# Altium PCB ECE453.PcbDoc
Units mil, origin at the board's own origin, x right, y up, seen from the top; angles counter-clockwise.
Board outline 2347.18 x 3917.24 mil, 2 copper layers (Top Layer, Bottom Layer); 28 components, 18 nets, 75 pads, 25 vias.
Unrouted connection lines stored in the file: 16.
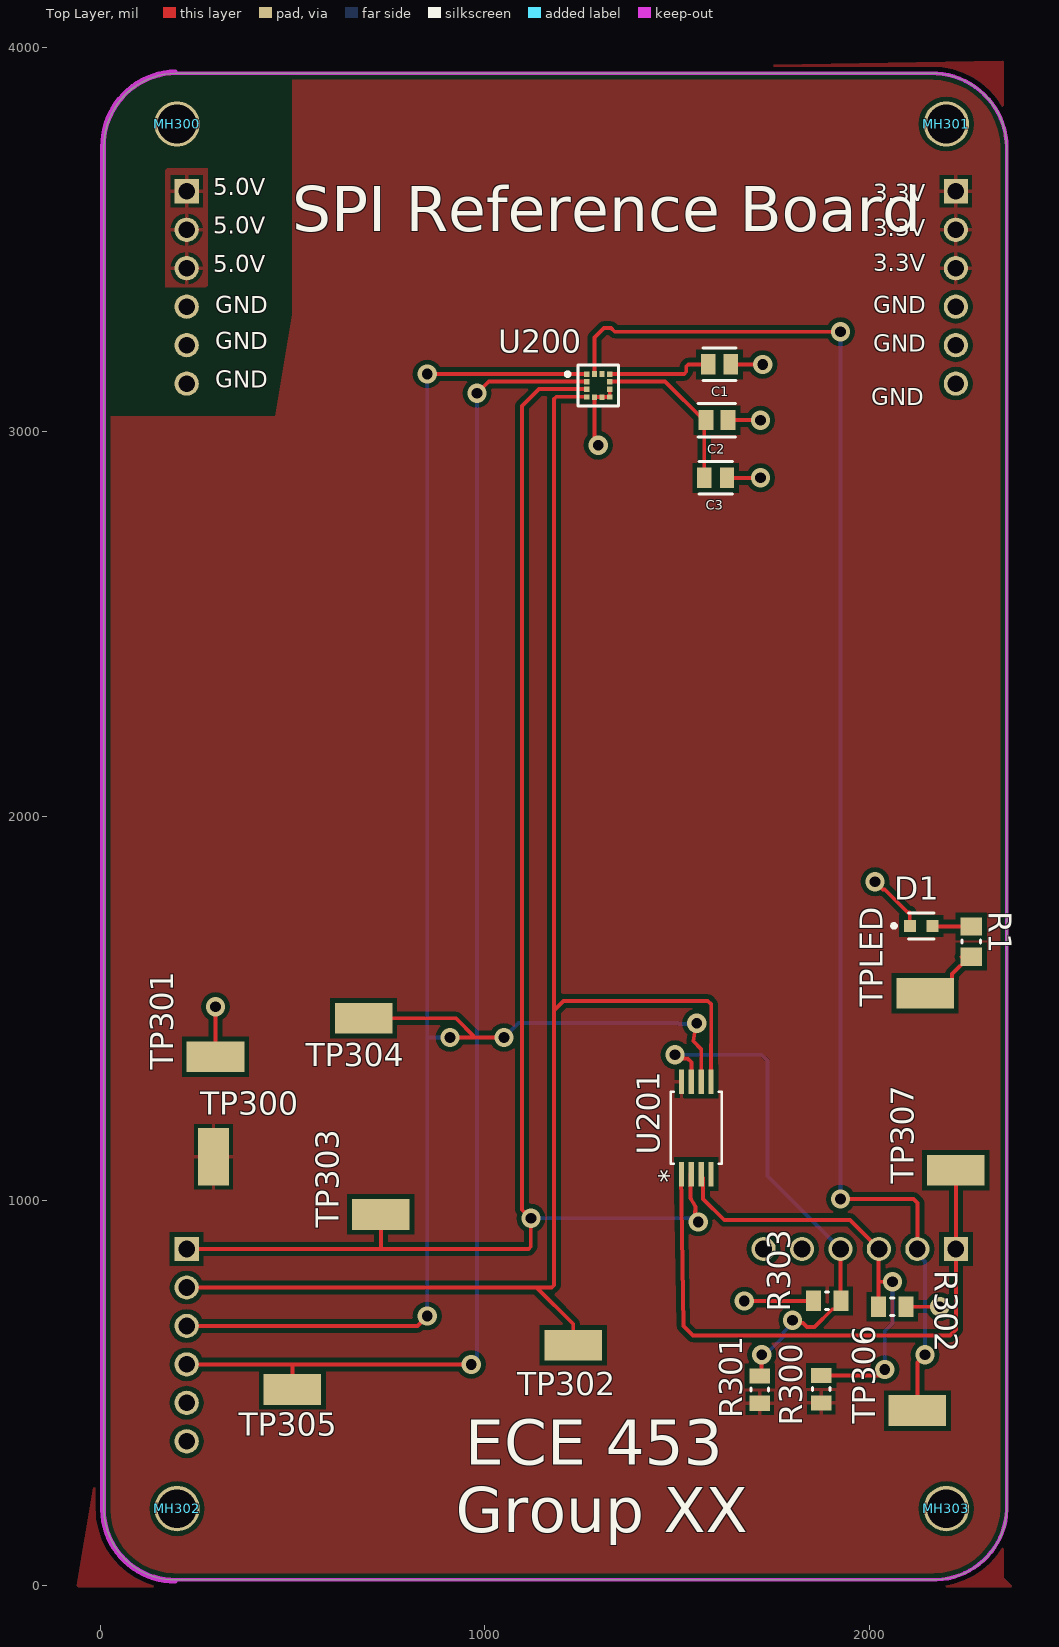
[diagram p0: Top Layer view]
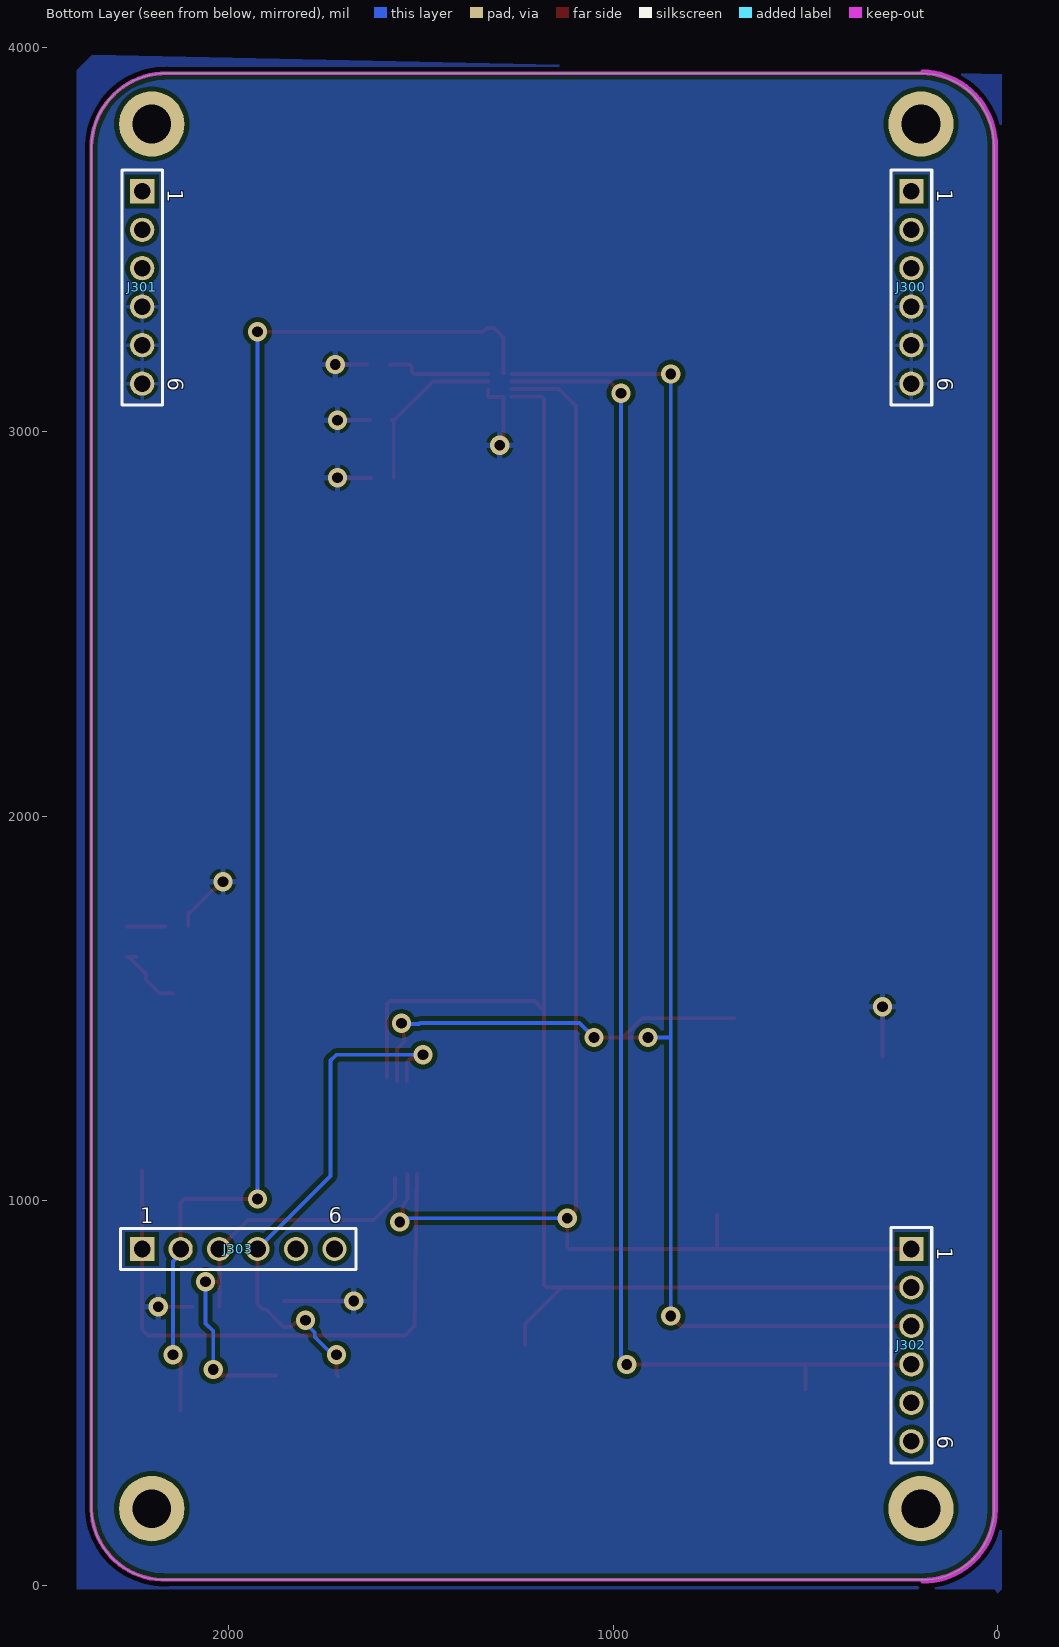
[diagram p1: Bottom Layer view, seen from below]
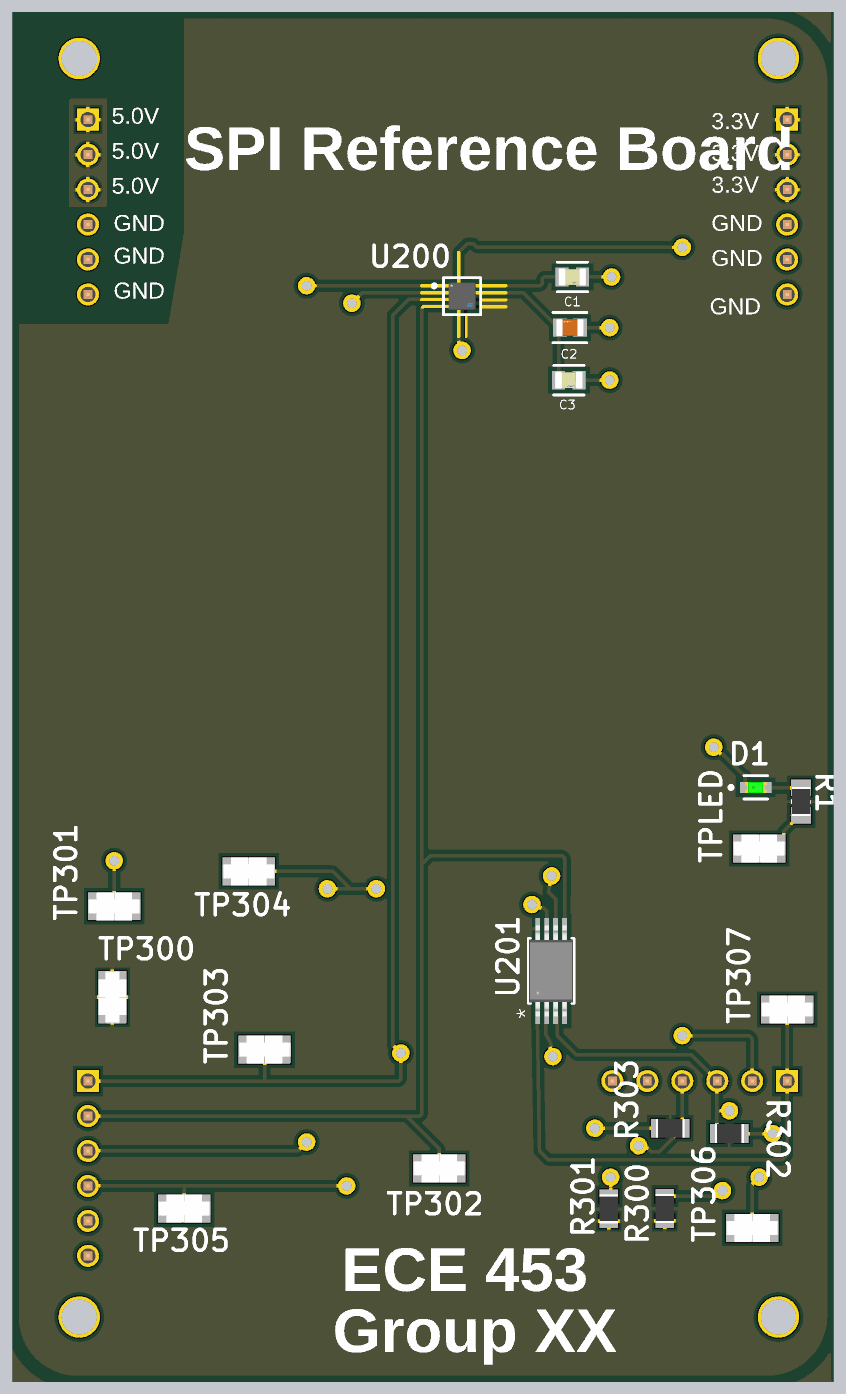
[diagram p2: 3D render of the assembled board from above, using the file's embedded part models]
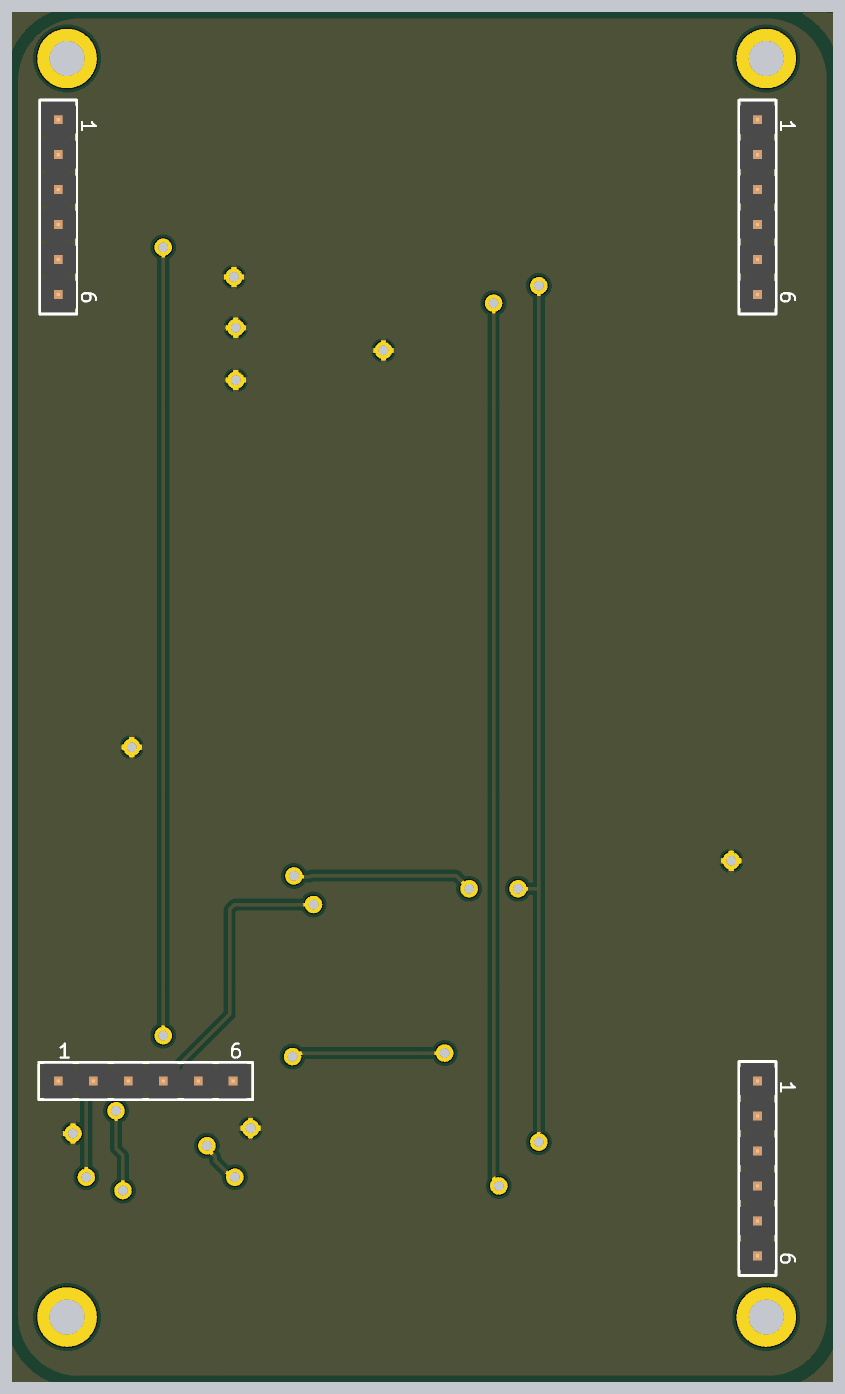
[diagram p3: 3D render of the assembled board from below, using the file's embedded part models]

## Layer stack, top to bottom
Top Solder: solder mask 0.4, Solder Resist, Dk 3.5
Top Layer: signal copper 1.4
Dielectric1: dielectric 12.6, FR-4, Dk 4.8
Bottom Layer: signal copper 1.4
Bottom Solder: solder mask 0.4, Solder Resist, Dk 3.5

## Board outline
10.01,196.88 ccw(c194.35,199.35) 196.78,15.01 cw(c196.85,10) 196.85,15.02 2160.35,15.02 cw(c2160.35,10) 2160.58,15.01 ccw(c2167.85,204.35) 2357.19,196.95 2357.19,3740.13 ccw(c2162.85,3737.66) 2160.45,3931.99 ccw(c2162.85,3737.66) 2160.42,3931.99 2160.45,3931.99 cw(c2160.35,3937.01) 2160.35,3931.99 200,3931.99 cw(c200,3937.01) 198.43,3932.25 cw(c196.85,3937.01) 196.91,3931.99 ccw(c199.35,3742.66) 10.01,3740.25 ccw(c199.35,3742.66) 10.01,3740.22 10.01,3740.25 cw(c5,3740.16) 10.01,3740.16 10.01,196.88 cw(c194.35,199.35)

## Design rules (kind name [scope] priority, off if disabled: settings)
Clearance Polygon_Clearance [All vs InPolygon] p1: gap=12 ignorepadtopadclearanceinfootprint=FALSE except(0: Arc-Hole Track-Hole SMDPad-Hole THPad-Hole Via-Hole Fill-Hole Poly-Hole Region-Hole Text-Hole)
Clearance [All] p2: gap=7.87 ignorepadtopadclearanceinfootprint=TRUE except(0: Arc-Hole Track-Hole SMDPad-Hole THPad-Hole Via-Hole Fill-Hole Poly-Hole Region-Hole Text-Hole)
ComponentClearance [InComponent('U3')] p1: gap=0 collisioncheckmode=3 verticalgap=10 showdistances=FALSE
Height [All] p1: minheight=0 maxheight=866.14 prefheight=500
HoleSize [All] p1: absolutevalues=TRUE maxlimit=250 minlimit=1.18 maxpercent=80.000 minpercent=20.000
MinimumSolderMaskSliver [All] p1: minsoldermaskwidth=1
NetAntennae NetAntennae_5.0V [InNet('5.0V')] p1: netantennaetolerance=0
NetAntennae NetAntennae_3.3V [InNet('3.3V')] p2: netantennaetolerance=0
PolygonConnect [IsNamedPolygon('5.0V_L01_P019') or IsNamedPolygon('3.3V_L01_P020') vs IsVia] p1: connectstyle=Relief reliefconductorwidth=10 reliefentries=4 polygonreliefangle="90 Angle" airgapwidth=10
PolygonConnect PolygonConnect_2 [All vs IsVia] p2: connectstyle=Relief reliefconductorwidth=15 reliefentries=4 polygonreliefangle="90 Angle" airgapwidth=10
PolygonConnect PolygonConnect_1 [All] p3: connectstyle=Relief reliefconductorwidth=10 reliefentries=4 polygonreliefangle="90 Angle" airgapwidth=10
RoutingVias [All] p1: holewidth=28 width=50 viastyle="Through Hole" minholewidth=15 minwidth=25 maxholewidth=28 maxwidth=50
SolderMaskExpansion [All] p1: expansion=4 istentingtop=FALSE
Width [All] p1: maxlimit=472.44 minlimit=3.94 preferedwidth=10 minimp=50.000000 maximp=50.000000 favimp=50.000000
25 further rules are at their usual default settings.

## Components (designator, comment, footprint, x,y, rotation, side; value= is the part's Value field where it differs from the comment)
C1 "100nF" FP-C0805C-DN-MFG 1610.47,3175 r180 top value="0.10 μF"
C2 "10μf" FP-GRM21B-0_15-IPC_C 1603.59,3030 r180 top
C3 "100nF" FP-C0805C-DN-MFG 1600.47,2880 r180 top value="0.10 μF"
D1 "LTST-C190GKT" FP-LTST-C190GKT-MFG 2135,1715 r0 top
J300 "61300611121" 61300611121 225,3375 r270 bottom locked
J301 "61300611121" 61300611121 2225,3375 r270 bottom locked
J302 "61300611121" 61300611121 225,625 r270 bottom locked
J303 "61300611121" 61300611121 1975,875 r180 bottom locked
MH300 "MHOLE_2_55MM" MHOLE_2_55MM#1 236.22,3740.16 r90 top locked
MH301 "MHOLE_2_55MM" MHOLE_2_55MM#2 2165.35,3740.16 r90 top locked
MH302 "MHOLE_2_55MM" MHOLE_2_55MM#3 236.22,236.22 r90 top locked
MH303 "MHOLE_2_55MM" MHOLE_2_55MM#4 2165.35,236.22 r0 top locked
R1 "1k" RESC2013X60X35ML10T20 2265,1674.37 r270 top
R300 "RC0805FR-0710KL" RESC2013X60X35NL10T20 1875,510.43 r90 top
R301 "RC0805FR-0710KL" RESC2013X60X35NL10T20 1715,509.57 r90 top
R302 "DNP" RESC2013X60X35NL10T20 2059.57,725 r0 top
R303 "DNP" RESC2013X60X35NL10T20 1890.43,740 r180 top
TP300 "3.3V" KSTN-5019_V 295,1115 r90 top
TP301 "GND" KSTN-5019_V 300,1375 r180 top
TP302 "MISO" KSTN-5019_V 1230,625 r180 top
TP303 "MOSI" KSTN-5019_V 730,965 r180 top
TP304 "SCK" KSTN-5019_V 685,1475 r180 top
TP305 "ACC_CS" KSTN-5019_V 500,510 r180 top
TP306 "ACC_INT" KSTN-5019_V 2125,455 r180 top
TP307 "EE_CS" KSTN-5019_V 2225,1079.75 r180 top
TPLED "3.3V" KSTN-5019_V 2145,1540 r180 top
U200 "LIS2DH12TR" FP-LGA-12-8365767-MFG 1295.16,3119.98 r0 top
U201 "M95512-DWDW4TP/K" TSSOP8_169MILS_DW_STM-M 1550,1190 r90 top

## Footprints (in the part's own frame and the unit in brackets; to place one, negate y for a bottom-side part, rotate by r counter-clockwise, add the part's x,y. Pads: shape width x height; smd on the part's side, far side on the other; paste and mask are expansions set on the pad)
61300611121 [mm] "Pin Header, pitch 2.54 mm, THT, Vertical, single row, 6p"
  rect 1.6x1.6 hole 1.1: 1(-6.35,0)
  round 1.6 hole 1.1: 2(-3.81,0) 3(-1.27,0) 4(1.27,0) 5(3.81,0) 6(6.35,0)
  silkscreen extent -7.77,-1.35 7.77,1.35, body extent -7.62,-1.27 7.62,1.27, height 8.57
FP-C0805C-DN-MFG [mm]
  rect 0.95x1.35 smd paste+0 mask+0: 1(-0.75,0) 2(0.75,0)
  silkscreen extent -1.1,-1.07 1.1,1.07, body extent -1.4,-0.85 1.4,0.85, height 0.25
FP-GRM21B-0_15-IPC_C [mil]
  rect 39.6x51.5 smd paste+0 mask+0: 1(-28.59,0) 2(28.59,0)
  silkscreen extent -48,-43 48,43, body extent -52,-31 52,31, height 10
FP-LGA-12-8365767-MFG [mm]
  rect 0.375x0.35 smd paste-1000 mask+0: 1(-0.763,0.75) 2(-0.763,0.25) 3(-0.763,-0.25) 4(-0.763,-0.75) 7(0.763,-0.75) 8(0.763,-0.25) 9(0.763,0.25) 10(0.763,0.75)
  rect 0.35x0.375 smd paste-1000 mask+0: 5(-0.25,-0.763) 6(0.25,-0.763) 11(0.25,0.763) 12(-0.25,0.763)
  silkscreen extent -2.15,-1.35 1.35,1.35, body extent -1.58,-1.58 1.58,1.58, height 0.25
FP-LTST-C190GKT-MFG [mm]
  rect 0.8x0.8 smd paste+0 mask+0: 1(-0.75,0) 2(0.75,0)
  silkscreen extent -1.92,-0.85 0.85,0.85, body extent -1.25,-0.55 1.25,0.55, height 0.25
KSTN-5019_V [mm] "Test Point, 1-Leads, Body 3.81x2.03mm"
  rect 3.8x2.03 smd: 1(0,0)
  body extent -1.9,-1.01 1.9,1.02, height 2.29
MHOLE_2_55MM#1 [mm] "2.55MM Mounting Hole"
  round 3 / inner round 4.572 / far side round 4.318 hole 2.55: 1(1.52,0.92)
MHOLE_2_55MM#2 [mm] "2.55MM Mounting Hole"
  round 3 / inner round 4.572 / far side round 4.318 hole 2.55: 1(1.52,-0.88)
MHOLE_2_55MM#3 [mm] "2.55MM Mounting Hole"
  round 3 / inner round 4.572 / far side round 4.318 hole 2.55: 1(-0.92,0.92)
MHOLE_2_55MM#4 [mm]
  round 3 / inner round 4.572 / far side round 4.318 hole 2.55: 1(0.88,-0.92)
RESC2013X60X35ML10T20 [mm] "Chip Resistor, 2-Leads, Body 2.1x1.35mm, IPC Low Density"
  rect 1.2x1.45 smd: 1(-1,0) 2(1,0)
  silkscreen extent -0.1,-0.63 0.1,0.63, body extent -1.05,-0.68 1.05,0.67, height 0.6
RESC2013X60X35NL10T20 [mm] "Chip Resistor, 2-Leads, Body 2.1x1.35mm, IPC Medium Density"
  rect 1x1.35 smd: 1(-0.9,0) 2(0.9,0)
  silkscreen extent -0.1,-0.58 0.1,0.58, body extent -1.05,-0.68 1.05,0.67, height 0.6
TSSOP8_169MILS_DW_STM-M [mil]
  rect 63.5x14 smd paste+0 mask+0: 1(-120.25,38.39) 2(-120.25,12.8) 3(-120.25,-12.8) 4(-120.25,-38.39) 5(120.25,-38.39) 6(120.25,-12.8) 7(120.25,12.8) 8(120.25,38.39)
  silkscreen extent -94,-66 94,66, body extent -130,-61 130,61, height 47

## Part data
C1 C3: library part CMP-2007-00279-2, "CAP CER 0.1UF 50V X7R 0805", Capacitance="0.10 μF", Manufacturer=KEMET, Manufacturer Part Number=C0805C104K5RACTU, Package=C0805C-DN, Temperature="-55°C to +125°C", Temperature Characteristic=X7R, Temperature Coefficient=30ppm/°C, Temperature Range High=+125°C, Temperature Range Low=-55°C, Tolerance=0.1, Voltage Rating="50 V", Automotive=No, Category=Cap, ComponentLink2Description=Datasheet, ComponentLink2URL=https://content.kemet.com/datasheets/KEM_C1003_C0G_SMD.pdf, Device Class L1="Passive Components", Device Class L2=Capacitors, Device Class L3="Ceramic Capacitors", Digikey Description="CAP CER 0.1UF 50V X7R 0805", Height=0.88mm, Ipc Land Pattern Name=CAPC200125X78, Lead Free=Yes, Material=Ceramic, Mouser Description="Cap Ceramic 0.1uF 50V X7R 10% SMD 2.0 x 1.2 mm 125 C Paper T/R", Octopart=https://octopart.com/c0805c104k5ractu-kemet-143926, RoHS=TRUE
C2: library part CMP-2007-03541-2, "Chip Multilayer Ceramic Capacitors for General Purpose, 0805, 10uF, X5R, 15%, 10%, 25V", Capacitance=10uF, Case Code (Imperial)=0805, Case Code (Metric)=2012, Dielectric=X5R, Max Operating Temperature=85°C, Min Operating Temperature=-55°C, Package Quantity=1, Tolerance=10%, Voltage=25V, Case/Package=0805, Depth=1.25mm, Height=1.25mm, Lead Free="Lead Free", Length=2mm, Material=Ceramic, Mount="Surface Mount", Packaging="Tape and Reel", Parameter 1=C1, Radiation Hardening=No, Termination=SMD/SMT, Thickness=0.053inch, Voltage Rating=25V, Voltage Rating (DC)=25V, Width=0.049inch
D1: library part CMP-22017-000005-2, "LED GREEN CLEAR CHIP SMD", Case Code (Imperial)=0603, Case Code (Metric)=1608, Color=Green, Forward Current=30mA, Forward Voltage=2.1V, Lens Color=Colorless, Max Operating Temperature=85°C, Min Operating Temperature=-55°C, Package Quantity=1, Power Dissipation=100mW, Reverse Voltage=5V, Test Current=10mA, Voltage=2V, Case/Package=0603, Depth=0.8mm, Dominant Wavelength=569nm, Height=0.8mm, Illumination Color=Green, Lead Free="Lead Free", Length=1.6mm, Lens Style=Clear, Lens Transparency=Clear, Luminous Intensity=6mcd, Mount="Surface Mount", Number of Elements=1, Number of LEDs=1, Number of Pins=2, Packaging="Tape and Reel", Power Rating=100mW, Radiation Hardening=No, Viewing Angle=130°, Wavelength=565nm, Width=0.8mm
J300 J301 J302 J303: library part CMP-1502-01070-1, "THT Vertical Pin Header WR-PHD, Pitch 2.54 mm, Single Row, 6 pins", Color=Black, Contact Resistance=20mOhm, Current Rating=3A, Manufacturer="Wurth Elektronik", Manufacturer 1="Wurth Electronics", Max Operating Temperature=125°C, Min Operating Temperature=-40°C, Operating Temperature=-40to105degC, Supplier Part Number 1=732-5319-ND, Voltage Rating=250V, Withstanding Voltage=500VAC, Working Voltage=250VAC, Category="Headers and Wire Housings", ComponentLink1Description=http://www.mouser.com/ds/2/445/6130xx11121-538006.pdf?src-supplier=Mouser, ComponentLink1URL=http://www.mouser.com/ds/2/445/6130xx11121-538006.pdf?src-supplier=Mouser, ComponentLink2Description=http://www.farnell.com/cad/1737268.pdf?src-supplier=Element14, ComponentLink2URL=http://www.farnell.com/cad/1737268.pdf?src-supplier=Element14, ComponentLink3Description=https://katalog.we-online.de/em/datasheet/6130xx11121.pdf?src-supplier=Digi-Key, ComponentLink3URL=https://katalog.we-online.de/em/datasheet/6130xx11121.pdf?src-supplier=Digi-Key, Connector Type="Male Pin", Contact Gender=Male, Contact Material="Copper Alloy,Copper", Contact Mating Length=0.236inch, Contact Plating=Gold, Contact Type="Male Pin", Datasheet URL=https://katalog.we-online.de/em/datasheet/6130xx11121.pdf, Gender=Male, Housing Material=PBT, Lead Free="Lead Free", Manufacturer Part Number 1=61300611121, Manufacturer URL=http://www.we-online.de, Mount="Through Hole", Mounting Technology=THT, Number of Contacts=6, Number of Positions=6, Number of Rows=1, Orientation=Vertical, Package Reference=61300611121, Packaging=Bag, Part Number=61300611121, Pin Number=6, Pitch=2.54mm, Pricing 1="1=0.35000, 10=0.29800, 25=0.24720, 50=0.20700, 100=0.18700, 1000=0.17100 (USD)", Publisher=WurthElektronik, Rated Current=3A, RoHS=Yes, RoHS Compliant=Yes, Row Number=Single, Series=WR-PHD, Stock 1=51753, Supplier 1=Digi-Key, Termination="Through Hole"
MH300 MH301 MH302 MH303: "Mounting Holde", Manufacturer Part Number="UW MTHOLE"
R1: library part CMP-2100-03671-1, "Chip Resistor, 1 KOhm, +/- 1%, 125 mW, -55 to 155 degC, 0805 (2012 Metric), RoHS, Tape and Reel", Case Code (Imperial)=0805, Case Code (Metric)=2012, Manufacturer=Yageo, Max Operating Temperature=155degC, Max Power Dissipation=125mW, Min Operating Temperature=-55degC, Package Description="2-Pin Surface Mounted Device, Body 2 x 1.25 mm", Package Quantity=1, Resistance=1KOhm, Temperature Coefficient=100ppm/degreesC, Tolerance=1%, Voltage Rating=150V, Case/Package=0805, Composition=ThickFilm, Datasheet URL=http://www.yageo.com/NewPortal/yageodocoutput?fileName=/pdf/R-Chip/PYu-RC_Group_51_RoHS_L_5.pdf, Datasheet Version="Rev. 5, 10/2016", Depth=1.25mm, Height=0.024inch, Lead Free=LeadFree, Length=0.079inch, Manufacturer URL=http://www.yageo.com/, Military Standard=Not, Number of Pins=2, Number of Terminations=2, Package Reference=0805, Packaging=TapeandReel, Power Rating=125mW, REACH SVHC=Unknown, RoHSCompliant=true, Termination=SMD/SMT, Voltage Rating (DC)=150V, Width=0.049inch
R300 R301: library part CMP-1659-00013-4, "Chip Resistor, 10 KOhm, +/- 1%, 0.125 W, -55 to 155 degC, 0805 (2012 Metric), RoHS, Tape and Reel", Case Code (Imperial)=0805, Case Code (Metric)=2012, Manufacturer=Yageo, Max Operating Temperature="155 degC", Max Power Dissipation=125mW, Min Operating Temperature="-55 degC", Package Quantity=5000, Resistance=10kR, Resistance Tolerance=1%, Resistor Type="Thick Film", Supplier Part Number 1=311-10.0KCRCT-ND, Temperature Coefficient=100ppm/°C, Voltage Rating="150 V", Case/Package=0805, Category="Chip SMD Resistors", ComponentLink1Description="Manufacturer URL", ComponentLink1URL=http://www.yageo.com/, ComponentLink2Description=Datasheet, ComponentLink2URL=http://www.yageo.com/documents/recent/PYu-RC_Group_51_RoHS_L_04.pdf, Construction=Rectangular, DatasheetVersion="Rev. 4, 02/2016", Depth=1.25mm, Features="Moisture Resistant", Height="0.5 mm", Lead Free="Lead Free", Length="2 mm", Manufacturer 1=Yageo, Manufacturer Part Number 1=RC0805FR-0710KL, Military Standard=Not, Mount="Surface Mount", Mounting Technology="Surface Mount", Number of Terminations=2, PackageDescription="2-Pin Surface Mounted Device, Body 2 x 1.25 mm", PackageReference=0805, Packaging="Tape and Reel", Pins=2, Power Rating=125mW, Pricing 1="1=0.10000, 10=0.03700, 100=0.01520, 1000=0.00682, 2500=0.00592 (USD)", REACH SVHC="No SVHC", RoHS=Yes, RoHS Compliant=Yes, RoHSCompliant=true, Series=RC, Size Code=0805, Stock 1=12202331, Supplier 1=Digi-Key, Technology="THICK FILM", Termination=SMD/SMT, Tolerance=1%, Width=0.049inch
R302 R303: library part CMP-1659-00013-4, "Chip Resistor, 10 KOhm, +/- 1%, 0.125 W, -55 to 155 degC, 0805 (2012 Metric), RoHS, Tape and Reel", Case Code (Imperial)=0805, Case Code (Metric)=2012, Manufacturer=Yageo, Manufacturer Part Number 1=RC0805FR-0710KL, Max Operating Temperature="155 degC", Max Power Dissipation=125mW, Min Operating Temperature="-55 degC", Package Quantity=5000, Resistance=10kR, Resistance Tolerance=1%, Resistor Type="Thick Film", Supplier Part Number 1=311-10.0KCRCT-ND, Temperature Coefficient=100ppm/°C, Voltage Rating="150 V", Case/Package=0805, Category="Chip SMD Resistors", ComponentLink1Description="Manufacturer URL", ComponentLink1URL=http://www.yageo.com/, ComponentLink2Description=Datasheet, ComponentLink2URL=http://www.yageo.com/documents/recent/PYu-RC_Group_51_RoHS_L_04.pdf, Construction=Rectangular, DatasheetVersion="Rev. 4, 02/2016", Depth=1.25mm, Features="Moisture Resistant", Height="0.5 mm", Lead Free="Lead Free", Length="2 mm", Manufacturer 1=Yageo, Military Standard=Not, Mount="Surface Mount", Mounting Technology="Surface Mount", Number of Terminations=2, PackageDescription="2-Pin Surface Mounted Device, Body 2 x 1.25 mm", PackageReference=0805, Packaging="Tape and Reel", Pins=2, Power Rating=125mW, Pricing 1="1=0.10000, 10=0.03700, 100=0.01520, 1000=0.00682, 2500=0.00592 (USD)", REACH SVHC="No SVHC", RoHS=Yes, RoHS Compliant=Yes, RoHSCompliant=true, Series=RC, Size Code=0805, Stock 1=12202331, Supplier 1=Digi-Key, Technology="THICK FILM", Termination=SMD/SMT, Tolerance=1%, Width=0.049inch
TP300 TP301 TP302 TP303 TP304 TP305 TP306 TP307 TPLED: library part CMP-1672-00008-1, "Test Point, 1 Position SMD, RoHS, Tape and Reel", Manufacturer 1="Keystone Electronics", Manufacturer Part Number 1=5019, Package Quantity=1000, Supplier Part Number 1=36-5019CT-ND, Body Material=Bronze, Category=Connectors, ComponentLink1Description="Manufacturer URL", ComponentLink1URL=http://www.keyelco.com/, ComponentLink2Description=Datasheet, ComponentLink2URL=http://www.keyelco.com/product-pdf.cfm?p=1357, ComponentLink3Description=https://datasheet.ciiva.com/16318/m60-2p61-16318395.pdf?src-supplier=Future+Electronics, ComponentLink3URL=https://datasheet.ciiva.com/16318/m60-2p61-16318395.pdf?src-supplier=Future+Electronics, ComponentLink4Description=https://datasheet.ciiva.com/16885/70182998-16885945.pdf?src-supplier=Allied+Electronics, ComponentLink4URL=https://datasheet.ciiva.com/16885/70182998-16885945.pdf?src-supplier=Allied+Electronics, ComponentLink5Description=https://datasheet.ciiva.com/14848/m60-2p61-14848437.pdf?src-supplier=Digi-Key, ComponentLink5URL=https://datasheet.ciiva.com/14848/m60-2p61-14848437.pdf?src-supplier=Digi-Key, ComponentLink6Description=https://datasheet.ciiva.com/14848/m60-2p61-14848438.pdf?src-supplier=Digi-Key, ComponentLink6URL=https://datasheet.ciiva.com/14848/m60-2p61-14848438.pdf?src-supplier=Digi-Key, ComponentLink7Description=https://datasheet.ciiva.com/14848/m60-2p61-14848439.pdf?src-supplier=Digi-Key, ComponentLink7URL=https://datasheet.ciiva.com/14848/m60-2p61-14848439.pdf?src-supplier=Digi-Key, Contact Material=Bronze, Contact Plating=Silver, DatasheetVersion=03/2014, Height=0.09inch, Lead Free="Lead Free", Material=Bronze, Mount="Surface Mount", Mounting Technology="Surface Mount", Number of Pins=1, PackageDescription="1-Pin Surface Mount Device, Body 3.81 x 2.03 mm", PackageReference=5019, Packaging="Tape and Reel", Pins=1, Plating=Silver, Pricing 1="1=0.34000, 25=0.27360, 100=0.22340, 250=0.20064, 500=0.19152 (USD)", Reach SVHC Compliant=Yes, RoHS=Yes, RoHS Compliant=Yes, RoHSCompliant=True, Series=5019, Stock 1=1127181, Supplier 1=Digi-Key, Termination=SMD/SMT
U200: library part CMP-2000-05369-2, "ACCEL 2-16G I2C/SPI 12LGA", Case/Package=LGA, Manufacturer 1=STMicroelectronics, Max Operating Temperature=85°C, Max Supply Voltage=3.6V, Min Operating Temperature=-40°C, Min Supply Voltage=1.71V, Supplier Part Number 1=497-14851-1-ND, Axis="X, Y, Z", Bandwidth=672Hz, Category=Accelerometers, ComponentLink1Description=https://datasheet.ciiva.com/46423/1836729-46423946.pdf?src-supplier=Element14, ComponentLink1URL=https://datasheet.ciiva.com/46423/1836729-46423946.pdf?src-supplier=Element14, Contact Plating=Gold, Height=1mm, Interface=I2C, Lead Free="Lead Free", Length=2.15mm, Manufacturer Part Number 1=LIS2DH12TR, Mount="Surface Mount", Number of Pins=12, Output Type=SPI, Packaging="Cut Tape", Pricing 1="1=2.11000, 10=1.89800, 25=1.79080, 100=1.52590, 500=1.25364, 1000=1.19394 (USD)", Radiation Hardening=No, REACH SVHC="No SVHC", Reach SVHC Compliant=Yes, RoHS=Yes, RoHS Compliant=Yes, Series=-, Stock 1=3389, Supplier 1=Digi-Key, Width=2.15mm
U201: "EEPROM Serial-SPI 512K-bit 64K x 8 3.3V/5V Automotive 8-Pin TSSOP T/R", Case/Package=TSSOP, Frequency=10MHz, Manufacturer 1=STMicroelectronics, Max Frequency=16MHz, Max Operating Temperature=145°C, Max Supply Voltage=5.5V, Min Operating Temperature=-40°C, Min Supply Voltage=2.5V, Nominal Supply Current=4mA, Supplier Part Number 1=497-14459-1-ND, Access Time=25ns, Category=EEPROM, ComponentLink1Description=https://datasheet.ciiva.com/29614/dm00046608-29614432.pdf?src-supplier=Digi-Key, ComponentLink1URL=https://datasheet.ciiva.com/29614/dm00046608-29614432.pdf?src-supplier=Digi-Key, ComponentLink2Description=https://datasheet.ciiva.com/48501/dm00046608-48501612.pdf?src-supplier=Avnet, ComponentLink2URL=https://datasheet.ciiva.com/48501/dm00046608-48501612.pdf?src-supplier=Avnet, Copyright="Copyright (C) 2022 Ultra Librarian. All rights reserved.", Density=512Kb, Interface=SPI,Serial, Manufacturer Part Number 1=M95512-DWDW4TP/K, Manufacturer_Part_Number=M95512-DWDW4TP/K, Memory Type=EEPROM, Mfr_Name=STMicroelectronics, Mount="Surface Mount", Number of Pins=8, Packaging="Tape and Reel", Pricing 1="1=2.30000, 10=2.07100, 25=2.03920, 50=2.03400, 100=1.81740, 250=1.76084 (USD)", Radiation Hardening=No, RefDes=RefDes, RoHS=Yes, RoHS Compliant=Yes, Stock 1=11469, Supplier 1=Digi-Key, Type=DEV

## Via types
v1: diameter 50, hole 28, Top Layer to Bottom Layer, 25 vias

## Nets (pads, with @x,y where several pads share a name; then routed paths per layer and width w, separated by ;. In a path a pad name is that pad's centre, name@x,y a point inside that pad or via, vN(x,y) a via of type N, cw(c..) or ccw(c..) an arc to the next point about the centre after c; other vN are vias at no path point)
3.3V: 
5.0V: J300.1 J300.2 J300.3
ACCEL_INT1: J303.2 TP306.1 U200.12 | length 3761.7
  Top Layer w10: U200.12@1285.18,3150.49 1285.18,3245 1310.18,3270 ; 1310,3270 1325,3270 ; 1328.05,3270 1338.05,3260 v1(1925,3260) ; v1(1925,1005) 2115,1005 2125,995 J303.2 ; TP306.1 2125,580 v1(2145,600)
  Bottom Layer w10: v1(1925,1005) v1(1925,3260) ; J303.2 2125,862.65 2145,842.65 v1(2145,600)
ACCEL_INT2: U200.11
ACCEL_SPI_CS_N: J302.4 TP305.1 U200.2 | length 3633.8
  Top Layer w10: J302.4 v1(965,575) ; TP305.1 500,575 ; v1(980,3100) 1010.31,3130.31 1180,3130.31 U200.2@1265,3130.31
  Bottom Layer w10: v1(965,575) 980,590 980,595 v1(980,3100)
EEPROM_IO_HOLD: J303.4 R301.2 R303.1 U201.7 | length 1398.8
  Top Layer w10: v1@1498.48,1380 1505.82,1380 1515.51,1370.32 1527.52,1370.32 1537.2,1360.64 U201.7 ; R301.2 1720,550 v1(1720,600) ; v1@1800,690.41 1807.65,682.76 1827.38,682.76 1837.6,672.54 1857.54,672.54 1903.43,718.43 1911.18,718.43 1925,732.24 R303.1@1925,740 ; J303.4 1925,740.87 R303.1
  Bottom Layer w10: v1(1495,1380) 1720,1380 1735,1365 1735,1065 J303.4 ; v1(1720,600) 1730,600 1776.17,646.17 1776.17,657.67 1800,681.5 v1@1800,690.41
  other v1: 1800,690
EEPROM_IO_WP_N: J303.3 R300.2 R302.1 U201.3 | length 1180.6
  Top Layer w10: U201.3@1567.8,1059.75 1567.8,1005 1622.8,950 1950,950 J303.3 ; R300.2 2025.87,545.87 v1@2040,560 ; v1@2024.13,545.87 v1(2040,561.73) ; R302.1 2024.13,790 ; J303.3@2024.13,874.13 2024.13,790 ; v1(2060,790) 2024.13,790
  Bottom Layer w10: v1(2040,561.73) 2040,661.5 2060,681.5 v1(2060,790)
EEPROM_SPI_CS_N: J303.1 TP307.1 U201.1 | length 1534.8
  Top Layer w10: U201.1@1510,1070 1516.61,675 1541.61,650 2210,650 2225,665 J303.1 TP307.1
GND: C1.1 C2.1 C3.1 D1.1 J300.4 J300.5 J300.6 J301.4 J301.5 J301.6 R302.2 R303.2 TP301.1 U200.5 U200.6 U200.7 U200.8 | length 967.4
  Top Layer w10: TP301.1 v1(300,1505) ; v1(1295,2965) 1295,2975.82 1285.39,2985.43 1285.39,3089.88 U200.5 U200.6@1304.86,3089.96 ; U200.6@1304.86,3090.45 U200.6@1304.86,3089.96 ; U200.6 1305.25,3090.21 1324.79,3090.21 1325,3090 1325.18,3090.18 U200.7 1325.18,3109.82 U200.8@1325,3110 ; U200.6 1304.96,3089.96 U200.6@1304.86,3089.96 ; C3.1 v1(1717.33,2880) ; C2.1 v1(1717.33,3030) ; C1.1 v1(1722.72,3175) ; v1(1675,740) R303.2 ; 2035,1810 2040,1810 2100,1750 2105,1750 ; R302.2 v1(2182.87,725) ; D1.1@2105,1715 2105,1745
  other v1: 2015,1830
NetD1_2: D1.2 R1.1 | length 99.2
  Top Layer w10: D1.2@2165.79,1713.74 R1.1
NetR1_2: R1.2 TPLED.1 | length 193
  Top Layer w10: TPLED.1 2179.84,1540 2214.8,1574.96 2214.8,1589.72 2260.08,1635 R1.2 R1.2@2240,1635
"OffSheet VDD": C2.2 C3.2 U200.9 | length 440
  Top Layer w10: U200.9@1325.04,3130.31 1420,3130.31 1469.08,3130.31 1569.39,3030 C2.2 ; C3.2 C2.2@1570.94,3028.45
"OffSheet VDD/IO": C1.2 U200.10 | length 274
  Top Layer w10: U200.10@1325.04,3150 1518.16,3150 1524.02,3155.86 1524.02,3169.14 1529.87,3175 C1.2
SPI_MISO: J302.2 TP302.1 U200.4 U201.5 | length 4152.4
  Top Layer w10: J302.2 1174.14,775 1180,780.86 1180,3085.09 1185.86,3090.94 U200.4@1265,3090.94 ; 1135,775 1230,680 TP302.1 ; 1180,1495 1205,1520 1580,1520 1588.39,1511.61 1588.85,1511.15 1588.85,1407.5 1588.39,1407.04 U201.5@1588.39,1320.25
SPI_MOSI: J302.1 TP303.1 U200.3 U201.2 | length 3932.8
  Top Layer w10: J302.1 730,875 ; TP303.1 730,875 ; U200.3@1265,3110.63 1180,3110.63 1140.86,3110.63 1135,3104.77 1097.13,3066.9 1097.13,977.19 1119.66,954.66 1119.66,880.86 1113.8,875 730,875 ; U201.2@1535.2,1070.33 1535.2,1037.35 1535,1037.14 1535,1010.29 1535,1007.64 1536.31,1005.34 1548.42,984.09 1548.42,973.7 1547.13,972.4 1547.13,947.6 v1@1552.36,942.36
  Bottom Layer w10: v1(1120,955) v1@1550,955
  other v1: 1555,945
SPI_SCK: J302.3 TP304.1 U200.1 U201.6 | length 4691.1
  Top Layer w10: J302.3 825,675 v1(850.49,700.49) ; TP304.1 925,1475 975,1425 980,1425 ; v1(850.49,3150) U200.1@1265,3150 ; v1(910,1425) v1(1050,1425) ; v1@1550,1460 1542.2,1415.59 1562.8,1395 U201.6
  Bottom Layer w10: v1(850.49,700.49) 850.49,1425 ; v1(850.49,3150) 850.49,1425 ; v1(910,1425) 850.49,1425 ; v1(1050,1425) 1087.87,1462.87 1502.13,1462.87 1505,1460 v1@1550,1460
  other v1: 1550.97,1461.84
VCC: J301.1 J301.2 J301.3 R300.1 R301.1 TP300.1 U201.8
VSS: U201.4
pads on no net: J302.5 J302.6 J303.5 J303.6 MH300.1 MH301.1 MH302.1 MH303.1

## Polygon pours and split planes (outlines as drawn)
VCC on Top Layer "VCC" (solid, pour order 4): -61.33,-5 2375,-5 2350,20 2350,3965 500,3931.99 500,3304.82 455.09,3040 20,3040 20,474.54
5.0V on Top Layer "5.0V_L01_P002" (solid, pour order 2): 170,3680 170,3375 275,3375 280,3380 280,3685 175,3685
GND on Bottom Layer "GND_L02_P001" (solid, pour order 1): -10,3930 -10,-10 0,-20 10,-10 2395,-10 2395,3940 2355,3980

## Keep-outs
Keep-Out Layer:
  lines w10: 10.01,196.92 ccw(c194.35,199.35) 10.01,196.88 ; 5,196.85 ccw(c194.35,199.35) 196.85,10 cw(c194.35,199.35) 5,196.85 ; 5,196.85 5,3740.16 ; 5,196.85 5,3740.16 ; 5,3740.16 cw(c199.35,3742.66) 196.85,3937.01 ; 5,3740.16 cw(c199.35,3742.66) 196.85,3937.01 ; 10.01,196.88 ccw(c194.35,199.35) 196.78,15.01 cw(c196.85,10) 196.85,15.02 2160.35,15.02 cw(c2160.35,10) 2160.58,15.01 ccw(c2167.85,204.35) 2357.19,196.95 2357.19,3740.13 ccw(c2162.85,3737.66) 2160.45,3931.99 ; 10.01,196.88 10.01,3740.16 ccw(c5,3740.16) 10.01,3740.25 ; 10.01,3740.25 ccw(c199.35,3742.66) 10.01,3740.22 10.01,3740.25 ; 10.01,3740.25 cw(c199.35,3742.66) 196.91,3931.99 ccw(c196.85,3937.01) 198.43,3932.25 ccw(c200,3937.01) 200,3931.99 2160.35,3931.99 ccw(c2160.35,3937.01) 2160.45,3931.99 ; 196.85,3937.01 196.85,3937.01 ; 196.85,3937.01 196.85,3937.01 ; 2160.45,3931.99 ccw(c2162.85,3737.66) 2160.42,3931.99 ; 2160.42,3931.99 2160.45,3931.99

## Silkscreen, mask and mechanical layers (free items; w line width, h text height)
Top Overlay:
  text "5.0V" at 294.76,3600 h75
  text "3.3V" at 2010.05,3584.7 h75
  text "5.0V" at 294.76,3500 h75
  text "3.3V" at 2010.05,3493.86 h75
  text "SPI Reference Board" at 500,3481.5 h200
  text "3.3V" at 2010.05,3403.01 h75
  text "5.0V" at 294.76,3400 h75
  text "GND" at 300,3293.31 h75
  text "GND" at 2010.05,3293.31 h75
  text "GND" at 300,3200 h75
  text "GND" at 2010.05,3193.31 h75
  text "GND" at 300,3100 h75
  text "GND" at 2005,3055 h75
  text "ECE 453" at 950,275 h200
  text "Group XX" at 925,100 h200
Top Solder:
  lines w10: 1180,3090 1265,3090 ; 1180,3110 1265,3110 ; 1180,3130 1265,3130 ; 1180,3150 1265,3150 ; 1285,3005 1285,3090 ; 1285,3150 1285,3245 ; 1305,3005 1305,3090 ; 1325,3090 1420,3090 ; 1325,3110 1420,3110 ; 1325,3130 1420,3130 ; 1325,3150 1420,3150
Mechanical 2:
  lines w10: 196.85,3937.01 ccw(c199.35,3742.66) 5,3740.16 5,196.85 ccw(c194.35,199.35) 196.85,10 ; 200,3937.01 2160.35,3937.01 cw(c2162.85,3737.66) 2362.2,3740.16 2362.2,196.85 cw(c2167.85,204.35) 2160.35,10 196.85,10 ; 196.85,10 196.85,10

## Dimensions
5,3740.16 to 2362.2,3740.16 on Mechanical 1

## Text inside footprints (layer, text, board x,y; h text height)
J300: Bottom Overlay "1" at 158.07,3629.72 h40 r90; Bottom Overlay "6" at 158.07,3139.96 h40 r90
J301: Bottom Overlay "1" at 2158.07,3629.72 h40 r90; Bottom Overlay "6" at 2158.07,3139.96 h40 r90
J302: Bottom Overlay "1" at 158.07,879.72 h40 r90; Bottom Overlay "6" at 158.07,389.96 h40 r90
J303: Bottom Overlay "1" at 2229.72,941.93 h40; Bottom Overlay "6" at 1739.96,941.93 h40
U201: Top Overlay "*" at 1502.61,1047.25 h50 r90; Mechanical 13 "*" at 1542,1104 h50 r90